# Altium PCB SHT30_V1.00.PcbDoc
Units mm, origin at the board's own origin, x right, y up, seen from the top; angles counter-clockwise.
Board outline 13.31 x 7.53 mm, 2 copper layers (Top Layer, Bottom Layer); 3 components, 4 nets, 19 pads, 2 vias.
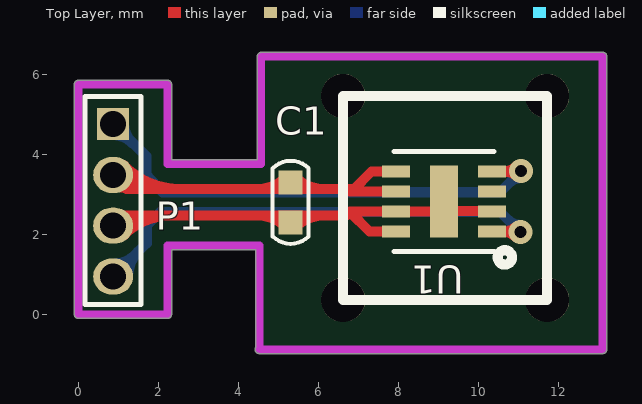
[diagram p0: Top Layer view]
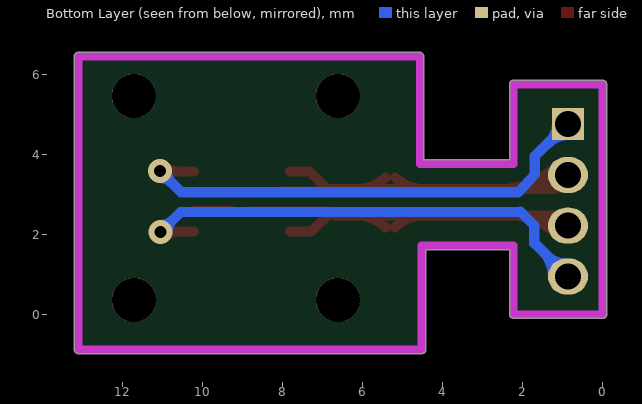
[diagram p1: Bottom Layer view, seen from below]

## Layer stack, top to bottom
Top Layer: signal copper 0.0356
Dielectric: dielectric 0.32, FR-4, Dk 4.8
Bottom Layer: signal copper 0.0356

## Board outline
-0.1,0 ccw(c0,0) 0,-0.1 2.23,-0.1 ccw(c2.23,0) 2.33,0 2.33,1.62 4.43,1.62 4.43,-0.836 ccw(c4.52,-0.88) 4.52,-0.98 13.11,-0.98 ccw(c13.11,-0.88) 13.21,-0.88 13.21,6.45 ccw(c13.11,6.45) 13.11,6.55 4.58,6.55 ccw(c4.58,6.45) 4.486,6.485 ccw(c4.57,6.43) 4.47,6.43 4.47,3.86 2.33,3.86 2.33,5.75 ccw(c2.23,5.75) 2.23,5.85 0,5.85 ccw(c0,5.75) -0.1,5.75

## Design rules (kind name [scope] priority, off if disabled: settings)
Clearance [All] p1: gap=0.2
ComponentClearance [All] p1 off: gap=0.254 collisioncheckmode=3 verticalgap=0.254 showdistances=FALSE
Height [All] p1 off: minheight=0 maxheight=25.4 prefheight=12.7
HoleSize [All] p1 off: absolutevalues=TRUE maxlimit=2.54 minlimit=0.025 maxpercent=80.000 minpercent=20.000
MinimumSolderMaskSliver [All] p1 off: minsoldermaskwidth=0.254
PolygonConnect [All] p1: connectstyle=Relief reliefconductorwidth=0.254 reliefentries=4 polygonreliefangle="90 Angle"
RoutingVias [All] p1: holewidth=0.3 width=0.6 viastyle="Through Hole" minholewidth=0.3 minwidth=0.6 maxholewidth=0.3 maxwidth=0.6
SilkToSilkClearance [All] p1 off: silktosilkclearance=0.254
SilkscreenOverComponentPads [All] p1 off: minsilkscreentomaskgap=0.254
SolderMaskExpansion [All] p1: expansion=0.102
TestPointUsage [All] p1: valid=0 allowmultiple=FALSE
Testpoint [All] p1: side=15 testpointundercomponent=TRUE minsize=1.016 maxsize=2.54 preferedsize=1.524 minholesize=0 maxholesize=1.016 preferedholesize=0.813 testpointgrid=0.025 style=1023 order=0123456789
Width [All] p1: maxlimit=0.254 minlimit=0.254 preferedwidth=0.254
18 further rules are at their usual default settings.

## Components (designator, comment, footprint, x,y, rotation, side; value= is the part's Value field where it differs from the comment)
C1 "0402-C" 0402-C 5.31,2.8 r270 top
P1 "Header 4" SIP_4_1.27 0.87,2.85 r90 top
U1 "Comment" SHT3XDIS 9.14,2.82 r180 top

## Footprints (in the part's own frame and the unit in brackets; to place one, negate y for a bottom-side part, rotate by r counter-clockwise, add the part's x,y. Pads: shape width x height; smd on the part's side, far side on the other; paste and mask are expansions set on the pad)
0402-C [mm]
  rect 0.6x0.6 smd: 1(-0.5,0) 2(0.5,0)
  silkscreen extent -1.04,-0.45 1.04,0.45, body extent -0.5,-0.25 0.5,0.25, height 0.5
SHT3XDIS [mm]
  rect 0.7x1.8 smd: 0(0,0)
  rect 0.7x0.3 smd: 1(-1.2,0.75) 2(-1.2,0.25) 3(-1.2,-0.25) 4(-1.2,-0.75) 5(1.2,-0.75) 6(1.2,-0.25) 7(1.2,0.25) 8(1.2,0.75)
  silkscreen extent -1.7,-1.25 1.25,1.58
SIP_4_1.27 [mm]
  rect 0.8x0.8 hole 0.65: 1(1.905,0)
  oval 0.9x1 hole 0.65: 2(0.635,0) 3(-0.635,0) 4(-1.905,0)
  silkscreen extent -2.6,-0.7 2.6,0.7

## Part data
P1: "Header, 4-Pin"

## Free pads (board coordinates)
  round 1.1 hole 1.1: ""(6.62,0.36) ""(6.62,5.46) ""(11.72,0.36) ""(11.72,5.46)

## Via types
v1: diameter 0.6, hole 0.3, Top Layer to Bottom Layer, tented both sides, 2 vias

## Nets (pads, with @x,y where several pads share a name; then routed paths per layer and width w, separated by ;. In a path a pad name is that pad's centre, name@x,y a point inside that pad or via, vN(x,y) a via of type N, cw(c..) or ccw(c..) an arc to the next point about the centre after c; other vN are vias at no path point)
GND: C1.2 P1.3 U1.0 U1.2 U1.7 U1.8 | length 13.9
  Top Layer w0.254: P1.3 1.125,2.47 6.7,2.47 6.8,2.57 ; P1.3@0.969,2.166 cw(c1.702,1.433) 1.702,2.47 ; P1.3@1.148,1.987 cw(c2.315,0.82) 2.315,2.47 ; 4.482,2.47 cw(c4.482,1.472) C1.2@5.188,2.178 ; C1.2@5.432,2.178 cw(c6.138,1.472) 6.138,2.47 ; 6.8,2.55 7.28,2.07 U1.8@7.82,2.07 ; 6.81,2.57 U1.7@7.73,2.57 ; U1.7@7.722,2.57 8.76,2.57 ; U1.0@9.26,2.58 10.21,2.58 U1.2@10.22,2.57
SHT30_SCL: P1.1 U1.4 | length 16.9
  Top Layer w0.254: U1.4@10.22,3.57 v1@11.01,3.57 ; U1.4@10.628,3.57 ccw(c10.628,4.022) 10.948,3.702 cw(c10.628,4.022) U1.4@10.628,3.57 ; U1.4@10.676,3.57 cw(c10.676,3.186) 10.948,3.458 ccw(c10.676,3.186) U1.4@10.676,3.57
  Bottom Layer w0.254: P1.1@0.87,4.78 1.66,3.99 ; 1.318,4.332 cw(c1.742,4.755) 1.143,4.755 ccw(c1.802,4.755) 1.336,4.289 ccw(c0.87,3.823) 0.87,4.482 cw(c0.87,3.763) 1.379,4.271 ; 1.7,3.96 1.7,3.495 2.11,3.05 10.54,3.05 v1(11.07,3.58) ; 10.775,3.285 cw(c11.07,2.989) 11.07,3.407 ccw(c11.07,2.989) 10.775,3.285 ; 10.775,3.285 ccw(c10.479,3.58) 10.897,3.58 cw(c10.479,3.58) 10.775,3.285
SHT30_SDA: P1.4 U1.1 | length 16.9
  Top Layer w0.254: U1.1@10.22,2.07 v1@10.96,2.07 ; U1.1@10.608,2.07 cw(c10.608,1.618) 10.928,1.938 ccw(c10.608,1.618) U1.1@10.608,2.07 ; U1.1@10.656,2.07 ccw(c10.656,2.454) 10.928,2.182 cw(c10.656,2.454) U1.1@10.656,2.07
  Bottom Layer w0.254: P1.4 1.69,1.765 ; P1.4@0.87,1.218 ccw(c0.87,1.877) 1.336,1.411 ccw(c1.802,0.945) P1.4@1.143,0.945 ; P1.4@0.92,1.268 ccw(c0.92,1.927) 1.386,1.461 ; P1.4@1.243,0.945 cw(c2.143,0.945) 1.507,1.582 ; 1.71,1.775 1.71,2.22 2.06,2.57 ; 2.04,2.56 10.55,2.56 v1(11.05,2.06) ; 10.755,2.355 cw(c10.459,2.06) 10.877,2.06 ccw(c10.459,2.06) 10.755,2.355 ; 10.755,2.355 ccw(c11.05,2.651) 11.05,2.233 cw(c11.05,2.651) 10.755,2.355
VCC: C1.1 P1.2 U1.5 U1.6 | length 13.3
  Top Layer w0.254: P1.2@0.789,3.354 ccw(c1.33,3.895) 1.33,3.13 ; P1.2 0.915,3.485 1.27,3.13 6.89,3.13 7.33,3.57 U1.5@7.82,3.57 ; P1.2@0.969,3.534 ccw(c1.944,4.509) 1.944,3.13 ; P1.2@1.148,3.713 ccw(c2.557,5.122) 2.557,3.13 ; 4.482,3.13 ccw(c4.482,4.128) C1.1@5.188,3.422 ; C1.1@5.432,3.422 ccw(c6.138,4.128) 6.138,3.13 ; 6.8,3.07 U1.6@8,3.07
pads on no net: U1.3

## Keep-outs
Keep-Out Layer:
  lines w0.2: 4.52,-0.88 13.11,-0.88 13.11,6.45 4.58,6.45 ; 4.53,-0.88 4.53,1.72 2.23,1.72 2.23,0 0,0 0,5.75 2.23,5.75 2.23,3.76 4.57,3.76 4.57,6.43

## Silkscreen, mask and mechanical layers (free items; w line width, h text height)
Top Overlay:
  lines w0.25: 6.62,0.36 11.72,0.36 11.72,5.46 6.62,5.46 6.62,0.36